# Altium PCB lora1262f30m.PcbDoc
Units mm, origin at the board's own origin, x right, y up, seen from the top; angles counter-clockwise.
Board outline 50 x 57 mm, 2 copper layers (Top Layer, Bottom Layer); 17 components, 16 nets, 69 pads, 77 vias.
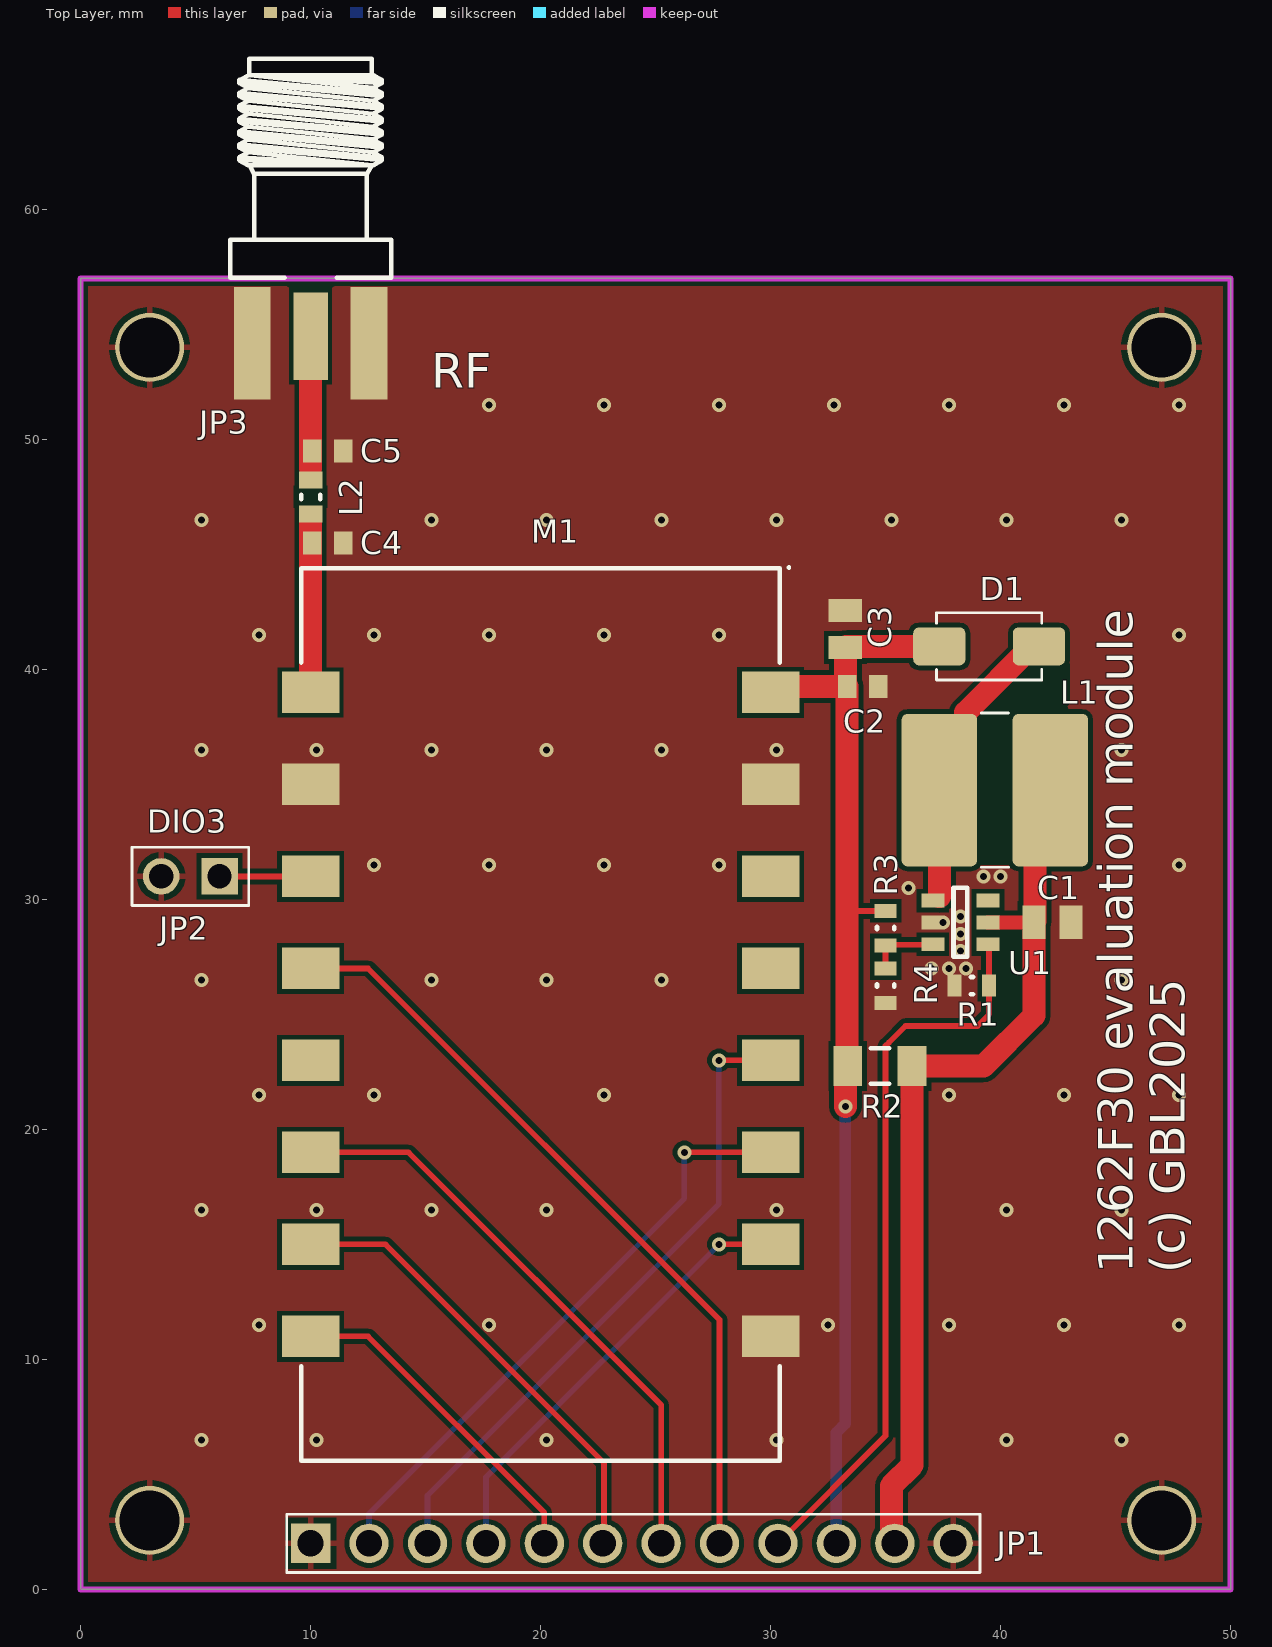
[diagram p0: Top Layer view]
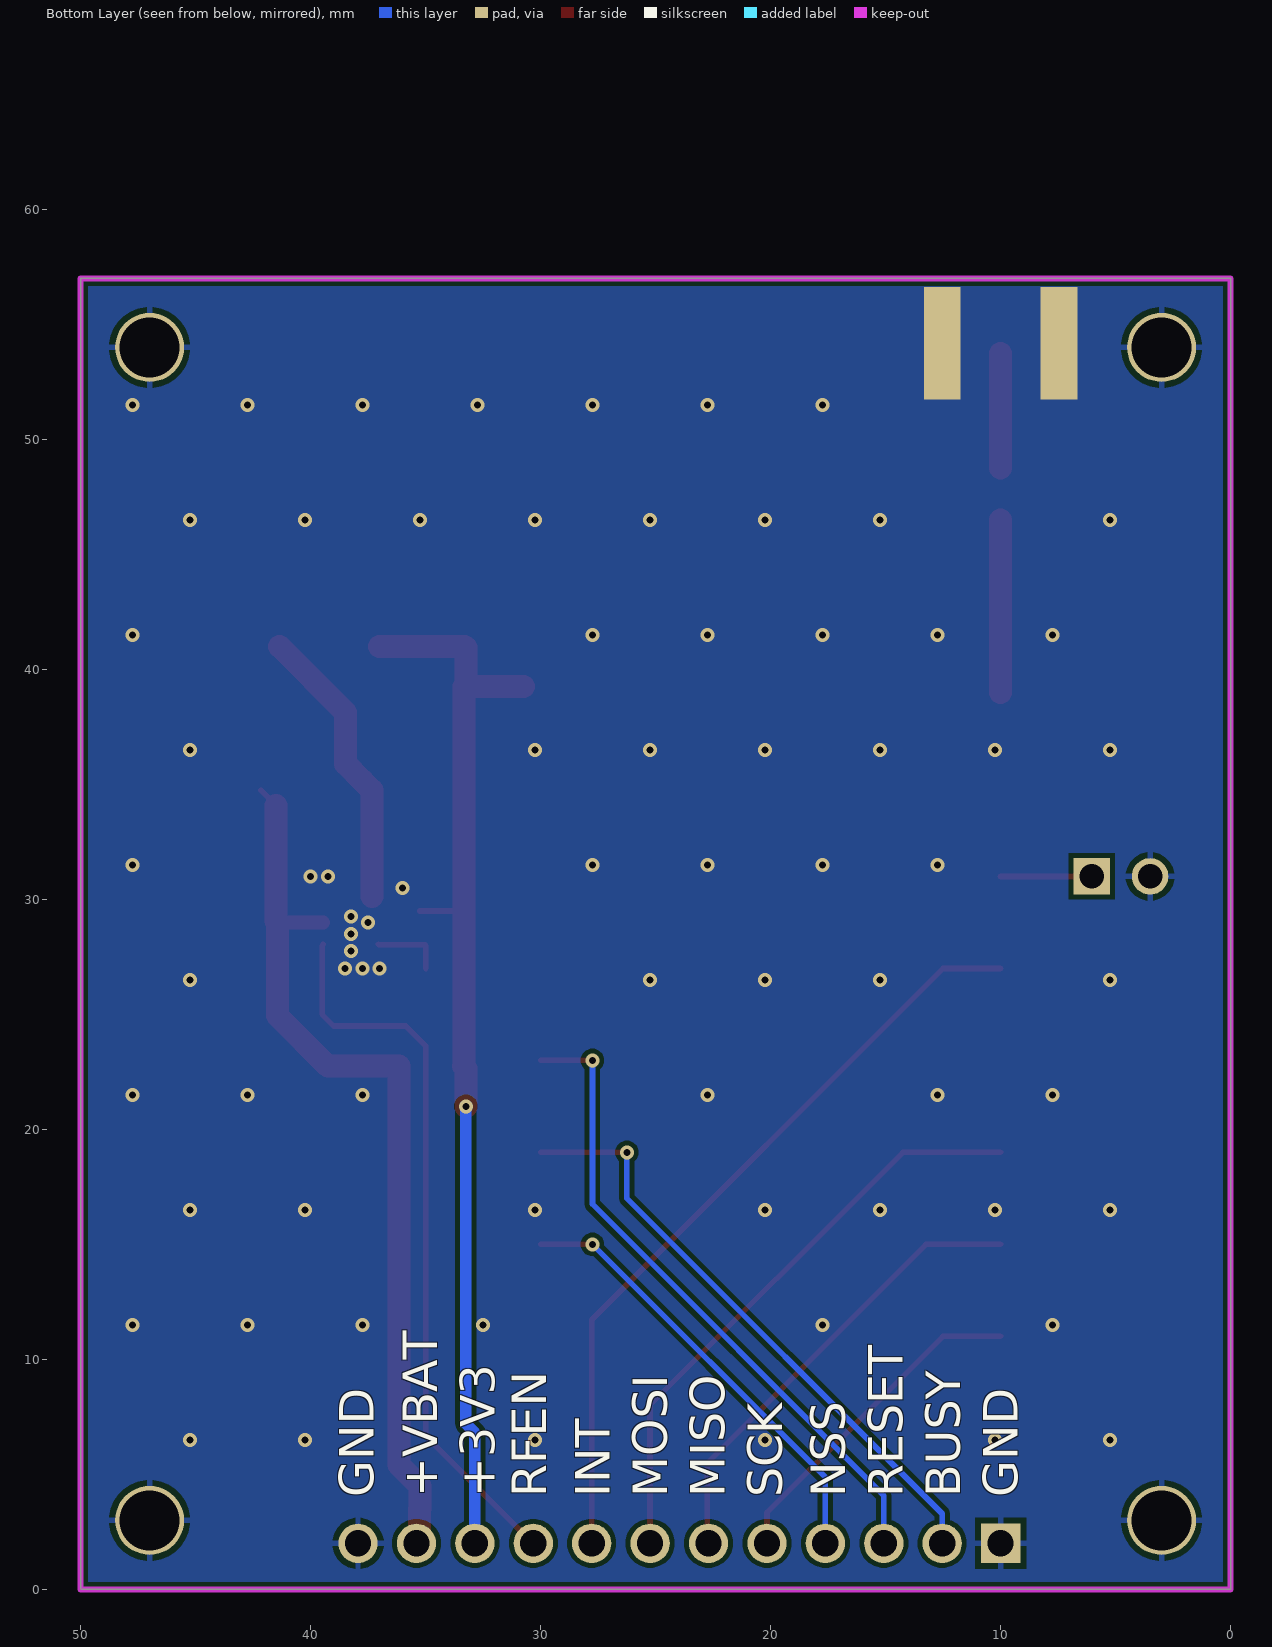
[diagram p1: Bottom Layer view, seen from below]
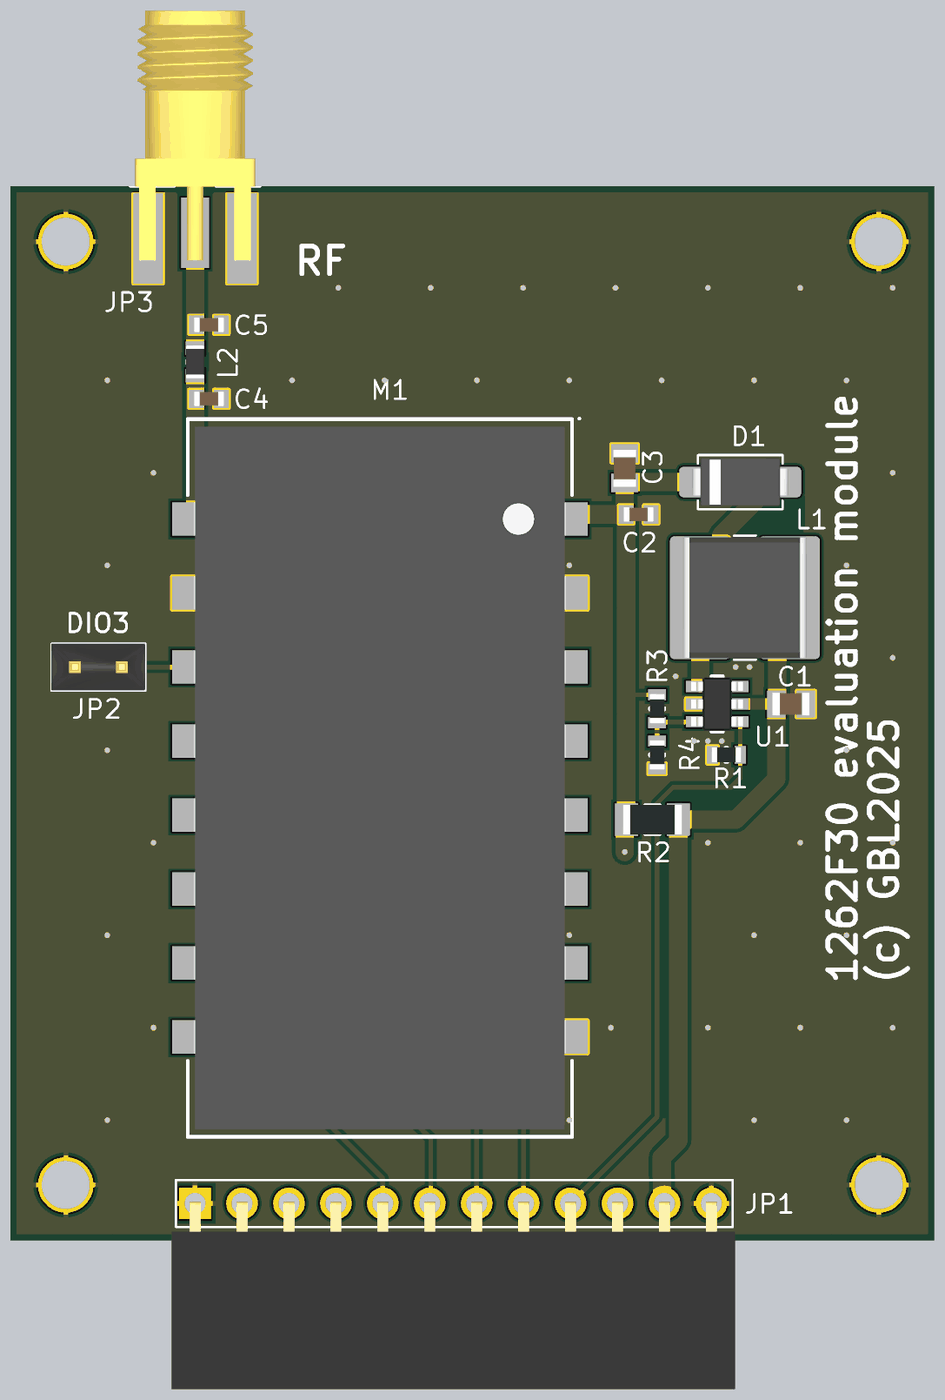
[diagram p2: 3D render of the assembled board from above, using the file's embedded part models]

## Layer stack, top to bottom
Top Solder: solder mask 0.0102, Solder Resist, Dk 3.5
Top Layer: signal copper 0.0356
Dielectric 1: dielectric 0.32, FR-4, Dk 4.8
Bottom Layer: signal copper 0.0356
Bottom Solder: solder mask 0.0102, Solder Resist, Dk 3.5

## Board outline
0,0 50,0 50,57 0,57

## Design rules (kind name [scope] priority, off if disabled: settings)
Clearance [All] p1: gap=0.2 ignorepadtopadclearanceinfootprint=FALSE
HoleSize [All] p1: absolutevalues=TRUE maxlimit=5 minlimit=0.025 maxpercent=80.000 minpercent=20.000
MinimumSolderMaskSliver [All] p1: minsoldermaskwidth=0.1
PolygonConnect PolygonConnect_1 [All vs IsNamedPolygon('GND_L01_P001') Or IsNamedPolygon('GND_L02_P000')] p1: thpad.connectstyle=Relief thpad.reliefconductorwidth=0.254 thpad.reliefentries=4 thpad.polygonreliefangle="90 Angle" thpad.airgapwidth=0.254 smdpad.connectstyle=Direct smdpad.reliefconductorwidth=0.254 smdpad.reliefentries=4 smdpad.polygonreliefangle="90 Angle" smdpad.airgapwidth=0.254 via.connectstyle=Direct via.reliefconductorwidth=0.254 via.reliefentries=4 via.polygonreliefangle="90 Angle" via.airgapwidth=0.254
PolygonConnect [All] p2: connectstyle=Relief reliefconductorwidth=0.254 reliefentries=4 polygonreliefangle="90 Angle" airgapwidth=0.254
RoutingVias [All] p1: holewidth=0.711 width=1.27 viastyle="Through Hole" minholewidth=0.711 minwidth=1.27 maxholewidth=0.711 maxwidth=1.27
SilkToSilkClearance [All] p1: silktosilkclearance=0.1
SilkToSolderMaskClearance [IsPad] p1: minsilkscreentomaskgap=0.1 clearancetoexposedcopper=TRUE
SolderMaskExpansion [All] p1: expansion=0.102 istentingtop=FALSE
SupplyNets "Schematic Supply Nets_2" [InNet('V_BATT')] p1: voltage=0.000
SupplyNets "Schematic Supply Nets_1" [InNet('GND')] p2: voltage=0.000
SupplyNets "Schematic Supply Nets" [InNet('VCC')] p3: voltage=0.000
Width [All] p1: maxlimit=2 minlimit=0.2 preferedwidth=0.25
26 further rules are at their usual default settings.

## Components (designator, comment, footprint, x,y, rotation, side; value= is the part's Value field where it differs from the comment)
C1 "22uF" C-0805 42.25,29 r0 top
C2 "100nF" C-0603 34,39.25 r0 top
C3 "22uF" C-0805 33.25,41.75 r90 top
C4 "nc" C-0603 10.75,45.5 r0 top
C5 "nc" C-0603 10.75,49.5 r0 top
D1 "DIODSH" D_SMA_NUM 39.5,41 r0 top
JP1 "CON12" PBS1-12R 10,2 r0 top locked
JP2 "HEADER 2" PLS1-2 6.04,31 r180 top
JP3 "EM-SA071-GGT" SMA_F_EDGE 10,55.75 r270 top locked
L1 "3.3uH" CDRH6D38 39.75,34.75 r180 top
L2 "R_0" L-0603 10,47.5 r90 top
M1 "LORA126XF30" LGA16_LORA126XF30 20,25 r0 top
R1 "100k" R-0603 38.75,26.25 r0 top
R2 "nc" R-1206 34.75,22.75 r0 top
R3 "110k" R-0603 35,28.75 r90 top
R4 "15k" R-0603 35,26.25 r90 top
U1 "MT3608" SOT-23-6 38.25,29 r0 top

## Footprints (in the part's own frame and the unit in brackets; to place one, negate y for a bottom-side part, rotate by r counter-clockwise, add the part's x,y. Pads: shape width x height; smd on the part's side, far side on the other; paste and mask are expansions set on the pad)
C-0603 [mm] "Chip Capacitor, 2-Leads, Body 1,60x0,80mm, IPC Medium Density"
  rect 0.8x1 smd: 1(-0.675,0) 2(0.675,0)
  body extent -0.8,-0.4 0.8,0.4, height 0.8
C-0805 [mm] "Chip Capacitor, 2-Leads, Body 2,00x1,25mm, IPC Medium Density"
  rect 1x1.45 smd: 1(-0.8,0) 2(0.8,0)
  body extent -1,-0.62 1,0.63, height 1.25
CDRH6D38 [mm] "Inductor, Molded Body; 6.50 mm L X 6.55 mm W X 4.00 mm H body"
  rrect15% 3.28x6.63 smd: 1(-2.415,0) 2(2.415,0)
  silkscreen extent -0.6,-3.35 0.6,3.35, body extent -3.35,-3.27 3.35,3.28, height 4
D_SMA_NUM [mm]
  rrect30% 2.27x1.65 smd: 1(2.165,0) 2(-2.165,0)
  silkscreen extent -2.29,-1.46 2.29,1.46, body extent -2.61,-1.3 2.61,1.3, height 2.41
L-0603 [mm] "Chip Inductor, 2-Leads, Body 1,60x0,80mm, IPC Medium Density"
  rect 0.74x1.02 smd: 1(-0.735,0) 2(0.735,0)
  silkscreen extent -0.1,-0.41 0.1,0.41, body extent -0.9,-0.5 0.9,0.5, height 1
LGA16_LORA126XF30 [mm]
  rect 2.5x1.8 smd: 1(10,14) 2(10,10) 3(10,6) 4(10,2) 5(10,-2) 6(10,-6) 7(10,-10) 8(10,-14) 9(-10,-14) 10(-10,-10) 11(-10,-6) 12(-10,-2) 13(-10,2) 14(-10,6) 15(-10,10) 16(-10,14)
  silkscreen extent -10.4,-19.4 10.84,19.48, body extent -10.05,-19 10.05,19, height 3
PBS1-12R [mm] "Header, Vertical, 2.54 mm pitch; 0.70 mm lead width, 10 pins, 1 row, 10 pins per row, 24.13 mm L X 2.54 mm W X 7.54 mm H body"
  rect 1.71x1.71 hole 1.14 paste-2539.97: 1(0,0)
  round 1.71 hole 1.14 paste-2539.97: 2(2.54,0) 3(5.08,0) 4(7.62,0) 5(10.16,0) 6(12.7,0) 7(15.24,0) 8(17.78,0) 9(20.32,0) 10(22.86,0) 11(25.4,0) 12(27.94,0)
  silkscreen extent -1.04,-1.27 29.1,1.27, body extent -1.27,-10.03 29.21,0.1, height 2.54
PLS1-2 [mm] "Header, Vertical, 2.54 mm pitch; 0.64 mm lead width, 2 pins, 1 row, 2 pins per row, 5.08 mm L X 2.54 mm W X 8.54 mm H body"
  rect 1.59x1.59 hole 1.06 paste-2539.97: 1(0,0)
  round 1.59 hole 1.06 paste-2539.97: 2(2.54,0)
  silkscreen extent -1.27,-1.27 3.81,1.27, body extent -1.27,-1.27 3.81,1.27, height 8.54
R-0603 [mm] "Chip Resistor, 2-Leads, Body 1,60x0,82mm, IPC Medium Density"
  rect 0.6x0.95 smd: 1(-0.75,0) 2(0.75,0)
  silkscreen extent -0.05,-0.38 0.05,0.38, body extent -0.8,-0.4 0.8,0.4, height 0.45
R-1206 [mm] "Chip Resistor, 2-Leads, Body 3,20x1,60mm, IPC Medium Density"
  rect 1.25x1.75 smd: 1(-1.4,0) 2(1.4,0)
  silkscreen extent -0.4,-0.77 0.4,0.77, body extent -1.6,-0.8 1.6,0.8, height 0.55
SMA_F_EDGE [mm] "SMA End Launch Jack for 1.58mm PCB, 50 Ohm, Flat Tab Contact"
  rect 3.81x1.5 smd: 1(1.27,0)
  rect 4.9x1.6 smd: 2(1.575,2.54) 2(1.575,-2.54)
  rect 4.9x1.6 smd far side: 2(1.575,2.54) 2(1.575,-2.54)
  silkscreen extent -10.81,-3.5 -1.28,3.5, body extent -10.73,-3.25 2.77,3.25, height 3.7
SOT-23-6 [mm] "SOT23, 6-Leads, Body 2,90x2,45mm, Pitch 0,95mm, IPC Medium Density"
  rect 1x0.6 smd: 1(-1.2,0.95) 2(-1.2,0) 3(-1.2,-0.95) 4(1.2,-0.95) 5(1.2,0) 6(1.2,0.95)
  silkscreen extent -0.3,-1.5 0.3,1.5, body extent -1.4,-1.45 1.4,1.45, height 1.55

## Part data
C1 C2 C3 C4 C5: library part CAPN, Voltage=50V, Вид=Конденсатор, Точність/група=NP0
JP1: "Connector", Вид=Роз'єм
JP3: library part SMA, "SMA Female R/A PCB Mount", Вид=Роз'єм
L1: library part L*, Вид=Індуктивність
L2: library part L, Вид=Індуктивність
R1 R2 R3 R4: library part RES, Вид=Резистор, Точність/група=5%
D1: Вид=Діод
JP2: Вид=Роз'єм

## Free pads (board coordinates)
  round 3 hole 2.6: 1(3,3) 1(3,54) 1(47,3) 1(47,54)

## Via types
v1: diameter 0.6, hole 0.3, Top Layer to Bottom Layer, tented both sides, 77 vias

## Nets (pads, with @x,y where several pads share a name; then routed paths per layer and width w, separated by ;. In a path a pad name is that pad's centre, name@x,y a point inside that pad or via, vN(x,y) a via of type N, cw(c..) or ccw(c..) an arc to the next point about the centre after c; other vN are vias at no path point)
GND: C1.2 C2.2 C3.2 C4.2 C5.2 JP1.1 JP1.12 JP2.2 JP3.2 M1.2 M1.8 M1.15 pad.1 R1.1 R4.1 U1.2
  other v1: 5.25,6.5 10.25,6.5 20.25,6.5 30.25,6.5 40.25,6.5 45.25,6.5 7.75,11.5 17.75,11.5 32.5,11.5 37.75,11.5 42.75,11.5 47.75,11.5 5.25,16.5 10.25,16.5 15.25,16.5 20.25,16.5 30.25,16.5 40.25,16.5 45.25,16.5 7.75,21.5 12.75,21.5 22.75,21.5 37.75,21.5 42.75,21.5 47.75,21.5 5.25,26.5 15.25,26.5 20.25,26.5 25.25,26.5 45.25,26.5 37,27 37.75,27 38.5,27 38.25,27.75 38.25,28.5 37.5,29 38.25,29.25 36,30.5 39.25,31 40,31 12.75,31.5 17.75,31.5 22.75,31.5 27.75,31.5 47.75,31.5 5.25,36.5 10.25,36.5 15.25,36.5 20.25,36.5 25.25,36.5 30.25,36.5 45.25,36.5 7.75,41.5 12.75,41.5 17.75,41.5 22.75,41.5 27.75,41.5 47.75,41.5 5.25,46.5 15.25,46.5 20.25,46.5 25.25,46.5 30.25,46.5 35.25,46.5 40.25,46.5 45.25,46.5 17.75,51.5 22.75,51.5 27.75,51.5 32.75,51.5 37.75,51.5 42.75,51.5 47.75,51.5
MISO: JP1.6 M1.10 | length 20.2
  Top Layer w0.25: M1.10 13.25,15 22.75,5.5 22.75,2.05 JP1.6
MOSI: JP1.7 M1.11 | length 25.8
  Top Layer w0.25: M1.11 14.25,19 25.24,8.01 JP1.7
NetC4_1: C4.1 L2.1 M1.16 | length 7.8
  Top Layer w0.25: L2.1@10,46.5 L2.1
  Top Layer w1: M1.16 L2.1@10,46.5
NetC5_1: C5.1 JP3.1 L2.2 | length 5
  Top Layer w1: 10,48.75 JP3.1@10,53.73
NetD1_1: D1.1 L1.2 U1.1 | length 14.7
  Top Layer w0.25: U1.1 37.16,29.95 U1.1@37.335,30.125 ; L1.2@37.75,35.165 L1.2@38.775,36.19 ; D1.1@41.355,41 D1.1
  Top Layer w1: U1.1@37.335,30.125 L1.2 37.75,35.165 38.475,35.89 38.475,38.12 D1.1@41.355,41
NetJP2_1: JP2.1 M1.14 | length 4
  Top Layer w0.25: JP2.1 M1.14
NetR3_1: R3.1 R4.2 U1.3 | length 3.1
  Top Layer w0.25: R4.2 R3.1 35.025,28.025 37.025,28.025 U1.3
RF_BUSY: JP1.2 M1.6 | length 26.4
  Top Layer w0.25: v1(26.25,19) M1.6
  Bottom Layer w0.25: JP1.2 12.54,3.29 26.25,17 v1(26.25,19)
RF_CS: JP1.4 M1.7 | length 19.4
  Top Layer w0.25: v1(27.75,15) M1.7
  Bottom Layer w0.25: JP1.4 17.62,4.87 v1(27.75,15)
RF_EN: JP1.9 R1.2 U1.4 | length 31.7
  Top Layer w0.25: JP1.9 35,6.68 35,23.636 35.146,23.782 35.864,24.5 39,24.5 39.5,25 R1.2 39.5,28 U1.4
RF_INT: JP1.8 M1.13 | length 33.8
  Top Layer w0.25: M1.13 12.5,27 27.78,11.72 JP1.8
RF_RST: JP1.3 M1.5 | length 28.5
  Top Layer w0.25: v1(27.75,23) M1.5
  Bottom Layer w0.25: JP1.3 15.08,4.08 27.75,16.75 v1(27.75,23)
SCK: JP1.5 M1.9 | length 14.7
  Top Layer w0.25: M1.9 12.5,11 20.16,3.34 JP1.5
V_BATT: C1.1 JP1.11 L1.1 R2.2 U1.5 | length 39.5
  Top Layer w0.25: C1.1 C1.1@41.5,29.05 ; L1.1@41.5,34.085 L1.1
  Top Layer w0.6: U1.5 C1.1
  Top Layer w1: JP1.11 35.264,2.136 35.264,3.486 35.25,3.5 35.25,4.5 36.15,5.4 R2.2 39.25,22.75 41.45,24.95 C1.1 ; C1.1@41.5,29.05 L1.1@41.5,34.085
VCC: C2.1 C3.1 D1.2 JP1.10 M1.1 R2.1 R3.2 | length 47.4
  Top Layer w0.25: C2.1@33.25,39.325 C2.1 ; C3.1 C3.1@33.3,41 ; 33.325,29.5 R3.2 ; R3.2@35.075,29.5 R3.2@35.25,29.5
  Top Layer w1: M1.1@30.75,39.25 C2.1 33.325,29.5 33.325,22.775 R2.1 33.25,22.65 v1(33.25,21) ; C2.1@33.25,39.325 C3.1 ; C3.1@33.3,41 D1.2@37,41
  Bottom Layer w0.5: JP1.10 32.86,6.819 33.25,7.209 v1(33.25,21)
pads on no net: M1.3 M1.4 M1.12 U1.6

## Polygon pours and split planes (outlines as drawn)
GND on Bottom Layer "GND_L02_P000" (solid, remove dead copper, pour order 0): 0,0 0,57 50,57 50,0
GND on Top Layer "GND_L01_P001" (solid, remove dead copper, pour order 1): 0,0 0,57 50,57 50,0

## Keep-outs
Keep-Out Layer:
  the board outline again, w0.254

## Other copper
Top Layer:
  pour cut-out: 9.25,48 9.25,47 10.75,47 10.75,48
  pour cut-out: 40.5,31.5 38.75,31.5 38.75,37.75 41.25,40.25 43,40.25 43,38.5 42.75,38.25 40.5,38.25

## Silkscreen, mask and mechanical layers (free items; w line width, h text height)
Top Overlay:
  text "RF" at 15.254,52.254 h1.5
  text "DIO3" at 2.9,32.9 h1
  text "1262F30 evaluation module" at 45.746,13.754 h1.5 r90
  text "(c) GBL2025" at 47.996,13.754 h1.5 r90
Bottom Overlay:
  text "GND" at 9.254,4.004 h1.5 r270
  text "BUSY" at 11.754,4.004 h1.5 r270
  text "RESET" at 14.254,4.004 h1.5 r270
  text "NSS" at 16.754,4.004 h1.5 r270
  text "SCK" at 19.504,4.004 h1.5 r270
  text "MISO" at 22.004,4.004 h1.5 r270
  text "MOSI" at 24.504,4.004 h1.5 r270
  text "INT" at 27.004,4.004 h1.5 r270
  text "RFEN" at 29.754,4.004 h1.5 r270
  text "+3V3" at 32.004,4.004 h1.5 r270
  text "+VBAT" at 34.504,4.004 h1.5 r270
  text "GND" at 37.254,4.004 h1.5 r270